# Altium PCB IRsensor_Relay_Controller.PcbDoc
Units mm, origin at the board's own origin, x right, y up, seen from the top; angles counter-clockwise.
Board outline 106.5 x 78.56 mm, 2 copper layers (Top Layer, Bottom Layer); 31 components, 26 nets, 92 pads, 0 vias.
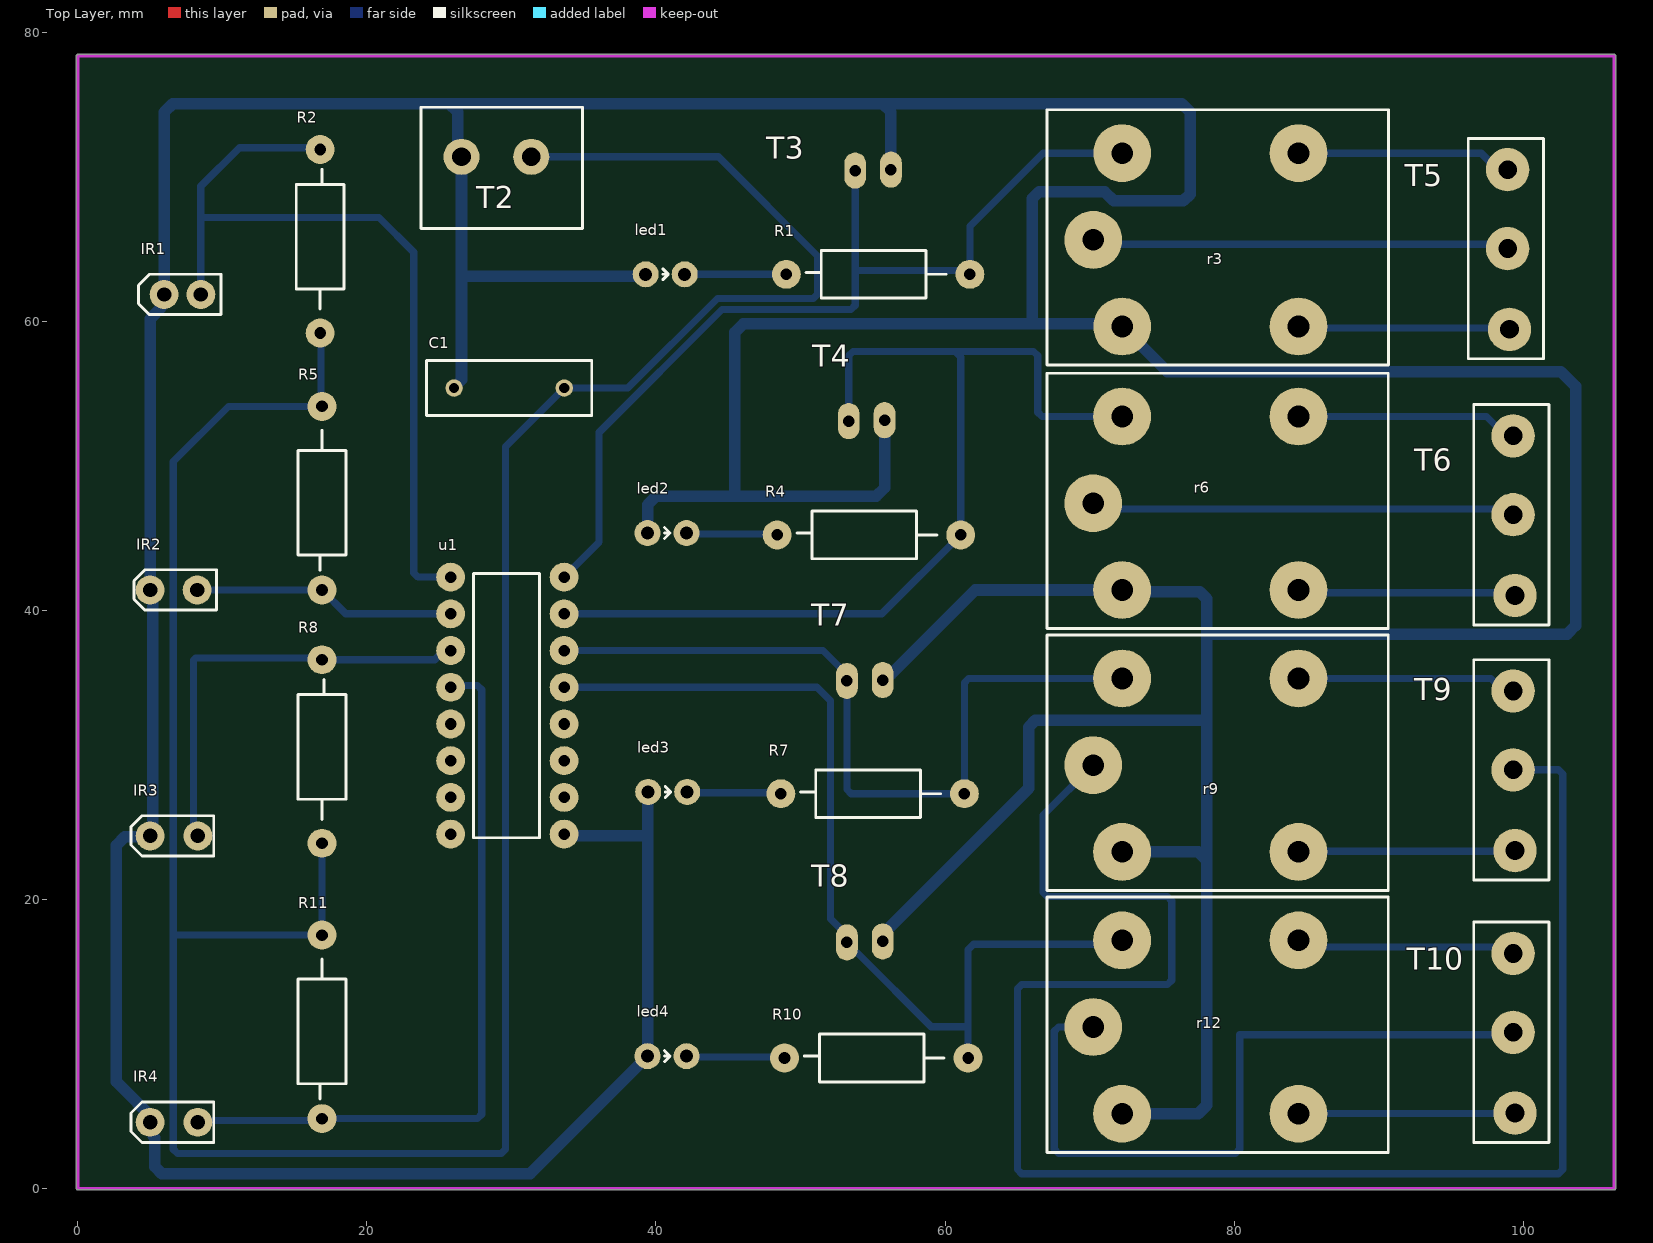
[diagram p0: Top Layer view]
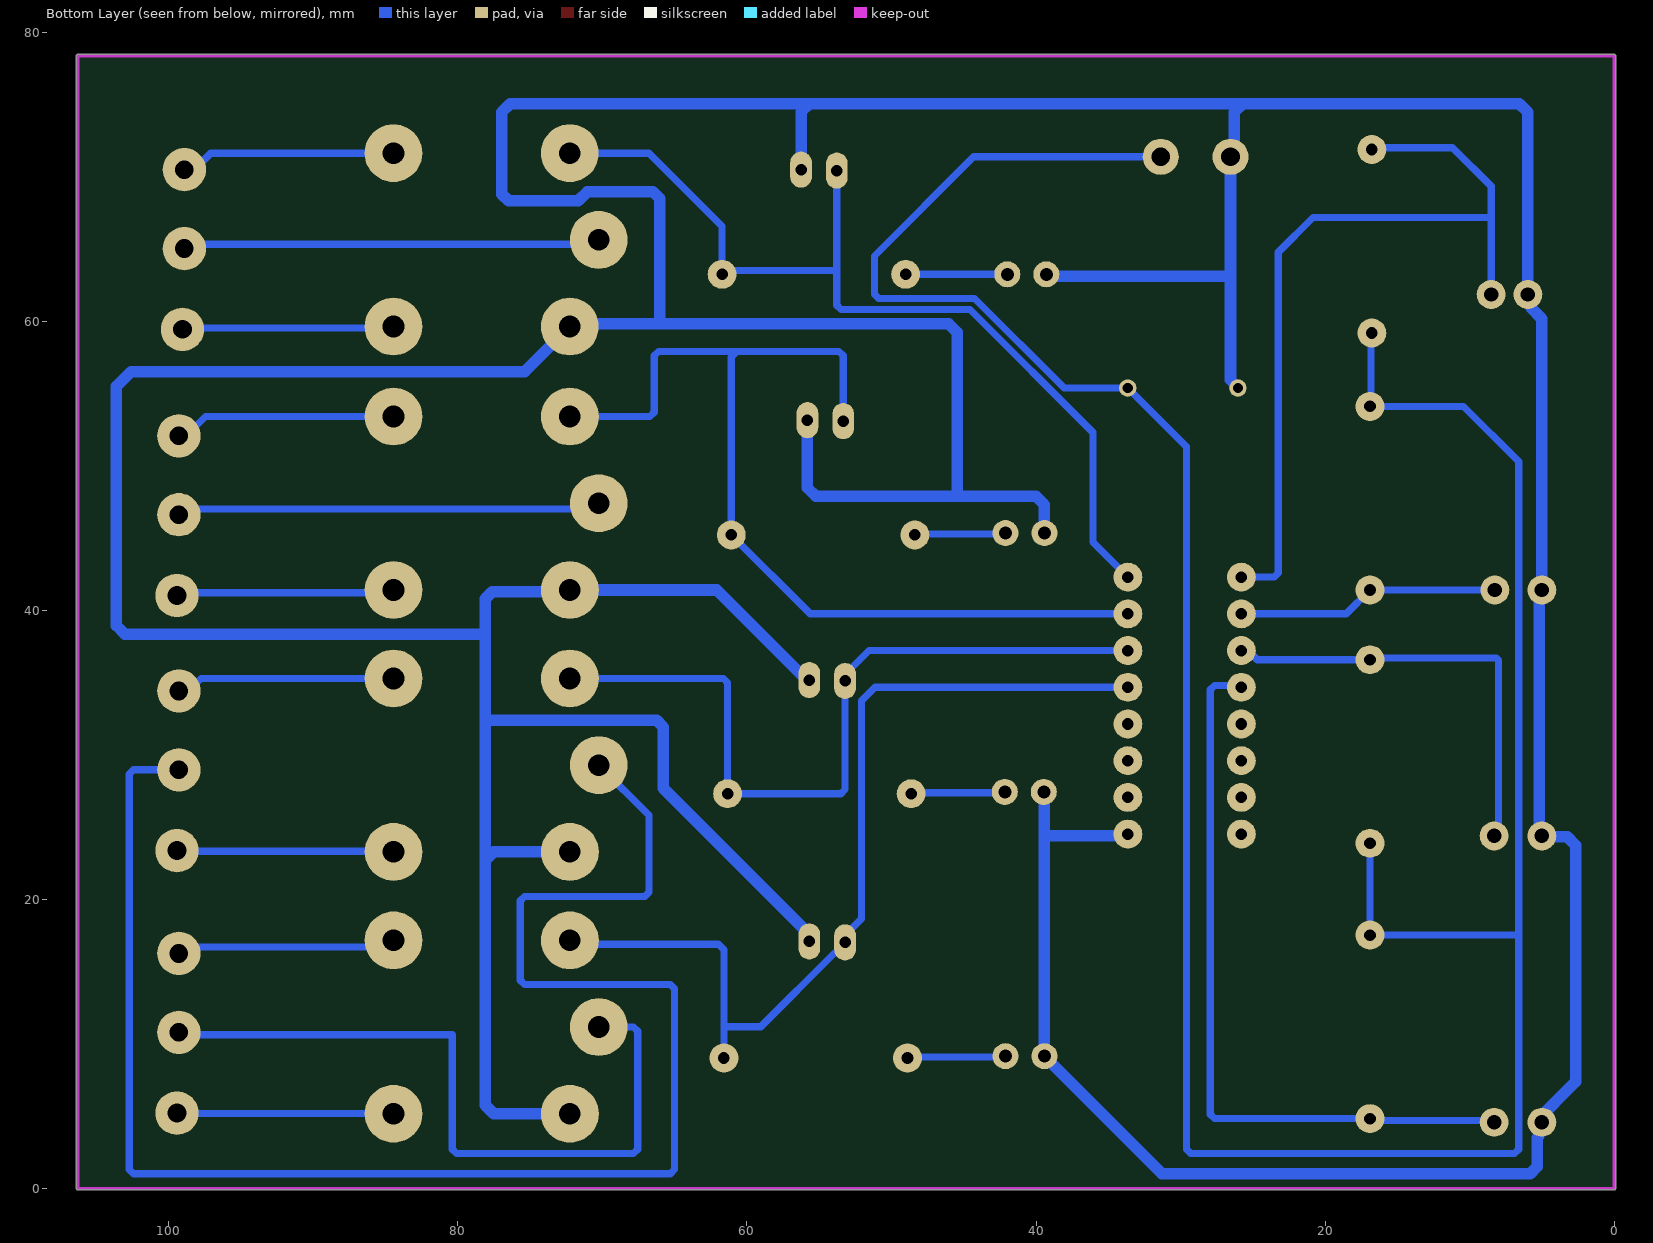
[diagram p1: Bottom Layer view, seen from below]
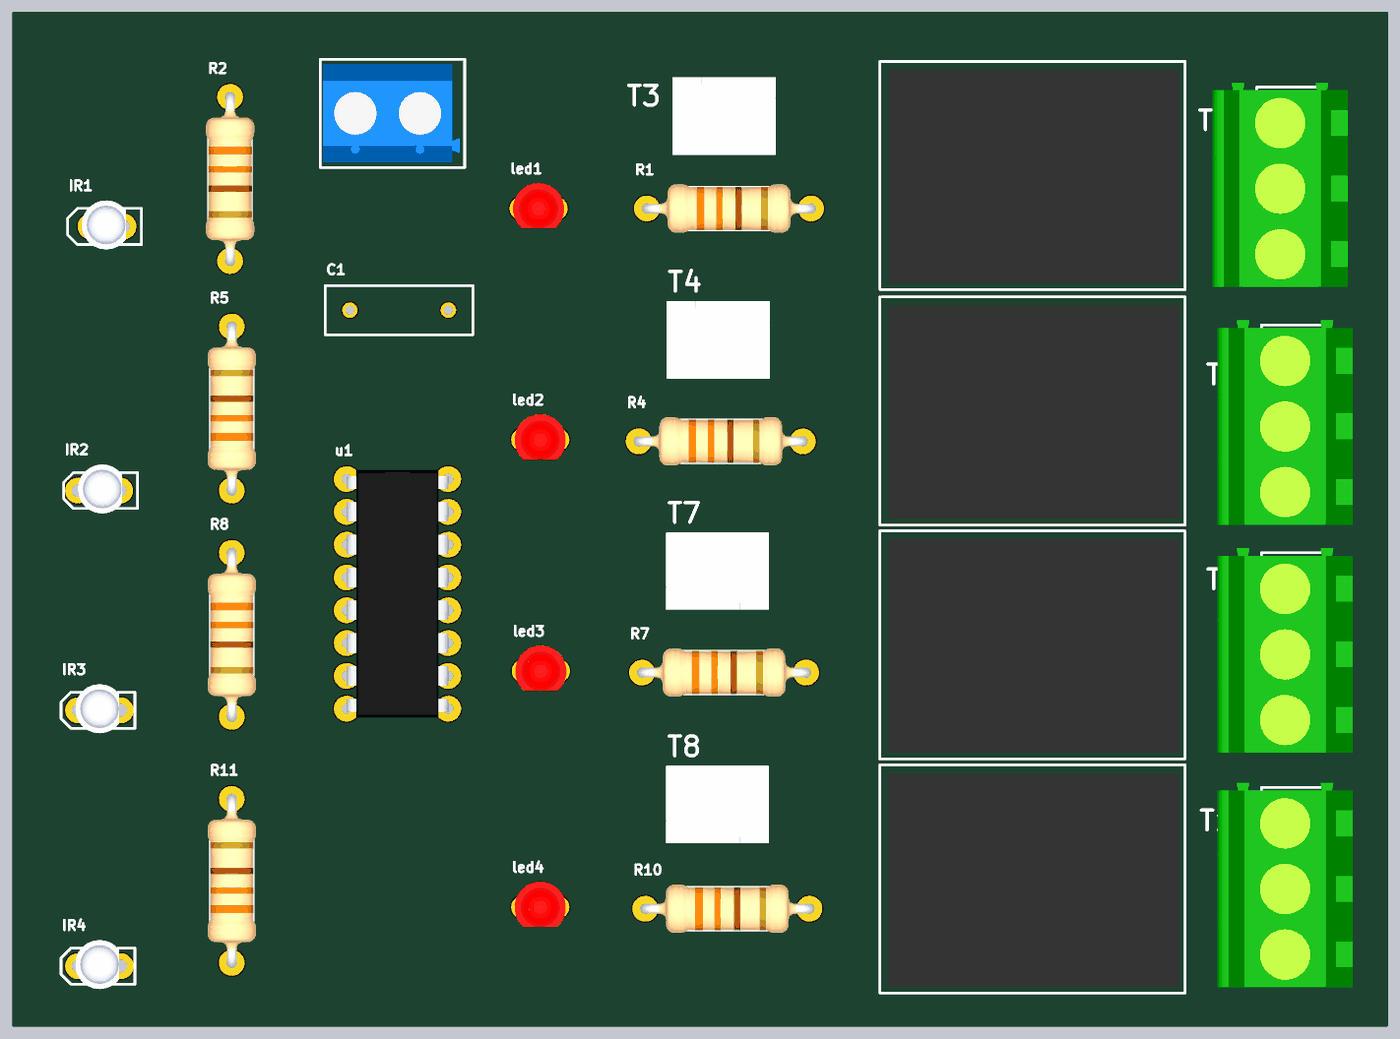
[diagram p2: 3D render of the assembled board from above, using the file's embedded part models]

## Layer stack, top to bottom
Top Solder: solder mask 0.0102, Solder Resist, Dk 3.5
Top Layer: signal copper 0.0356
Dielectric 1: dielectric 0.32, FR-4, Dk 4.8
Bottom Layer: signal copper 0.0356
Bottom Solder: solder mask 0.0102, Solder Resist, Dk 3.5

## Board outline
0,-0.1 cw(c0,0) -0.1,0 -0.1,78.359 cw(c0,78.359) 0,78.459 106.299,78.459 cw(c106.299,78.359) 106.399,78.359 106.399,0 cw(c106.299,0) 106.299,-0.1

## Design rules (kind name [scope] priority, off if disabled: settings)
Clearance Clearance_puli [InPolygon] p1: gap=1 ignorepadtopadclearanceinfootprint=FALSE
Clearance [All] p2: gap=0.25 ignorepadtopadclearanceinfootprint=FALSE
HoleSize [All] p1: absolutevalues=TRUE maxlimit=5 minlimit=0.1 maxpercent=80.000 minpercent=20.000
HoleToHoleClearance [All] p1: gap=0.2 allowstackedmicrovias=TRUE
MinimumSolderMaskSliver [All] p1: minsoldermaskwidth=0.1
PolygonConnect [All] p1: connectstyle=Relief reliefconductorwidth=0.254 reliefentries=4 polygonreliefangle="90 Angle" airgapwidth=0.254
RoutingVias [All] p1: holewidth=0.6 width=0.8 viastyle="Through Hole" minholewidth=0.5 minwidth=0.7 maxholewidth=1 maxwidth=2
SilkToSilkClearance [All] p1: silktosilkclearance=0.1
SilkToSolderMaskClearance [IsPad] p1: minsilkscreentomaskgap=0.1 clearancetoexposedcopper=TRUE
SolderMaskExpansion [All] p1: expansion=0.102 istentingtop=FALSE
Width [All] p1: maxlimit=1 minlimit=0.25 preferedwidth=0.3
25 further rules are at their usual default settings.

## Components (designator, comment, footprint, x,y, rotation, side; value= is the part's Value field where it differs from the comment)
C1 "Cap" RAD-0.3 29.845,55.372 r0 top value=100pF
IR1 "IR" "IR sensor"#1 8.509,61.849 r180 top
IR2 "IR" "IR sensor"#2 8.208,41.402 r180 top
IR3 "IR" "IR sensor"#3 8.001,24.384 r180 top
IR4 "IR" "IR sensor"#3 8.001,4.572 r180 top
led1 "led" led 40.64,63.246 r180 top
led2 "led" led 40.767,45.339 r180 top
led3 "led" led 40.814,27.432 r180 top
led4 "led" led 40.767,9.144 r180 top
R1 "R" "resistor 1/4 watt" 55.372,63.246 r0 top
R2 "R" "resistor 1/4 watt" 16.764,65.532 r270 top
r3 "relay" "relay 5vdc" 72.263,59.628 r0 top
R4 "R" "resistor 1/4 watt" 54.737,45.212 r0 top
R5 "R" "resistor 1/4 watt" 16.891,47.752 r90 top
r6 "relay" "relay 5vdc" 72.255,41.402 r0 top
R7 "R" "resistor 1/4 watt" 54.991,27.305 r0 top
R8 "R" "resistor 1/4 watt" 16.891,30.226 r270 top
r9 "relay" "relay 5vdc" 72.255,23.281 r0 top
R10 "R" "resistor 1/4 watt" 55.245,9.017 r0 top
R11 "R" "resistor 1/4 watt" 16.891,11.176 r90 top
r12 "relay" "relay 5vdc" 72.255,5.159 r0 top
T2 "terminal" "terminal 2pin" 28.956,71.374 r90 top
T3 "terminal C" "terminal C 2pin" 54.991,70.358 r0 top
T4 "terminal C" "terminal C 2pin" 54.546,53.023 r0 top
T5 "terminal" "terminal 3pin" 98.996,64.96 r180 top
T6 "terminal" "terminal 3pin" 99.377,46.545 r180 top
T7 "terminal C" "terminal C 2pin" 54.483,35.234 r180 top
T8 "terminal C" "terminal C 2pin" 54.483,17.145 r180 top
T9 "terminal" "terminal 3pin" 99.377,28.892 r180 top
T10 "terminal" "terminal 3pin" 99.377,10.731 r180 top
u1 "uln2003" uln2003 29.718,33.401 r0 top

## Footprints (in the part's own frame and the unit in brackets; to place one, negate y for a bottom-side part, rotate by r counter-clockwise, add the part's x,y. Pads: shape width x height; smd on the part's side, far side on the other; paste and mask are expansions set on the pad)
"IR sensor"#1 [mm]
  round 2 hole 1: +(0,0) -(2.54,0)
  silkscreen extent -1.4,-1.4 4.32,1.4, body extent -0.19,-2.02 3.24,1.78, height 12.58
"IR sensor"#2 [mm]
  round 2 hole 1: +(-0.045,0) -(3.208,0)
  silkscreen extent -1.4,-1.4 4.32,1.4, body extent -0.19,-2.02 3.24,1.78, height 12.58
"IR sensor"#3 [mm]
  round 2 hole 1: +(-0.299,0) -(3.001,0)
  silkscreen extent -1.4,-1.4 4.32,1.4, body extent -0.19,-2.02 3.24,1.78, height 12.58
led [mm]
  round 1.8 hole 0.9: +(1.35,0) -(-1.35,0)
  silkscreen extent -0.21,-0.38 0.17,0.38, body extent -1.99,-1.97 1.99,1.52, height 8.57
RAD-0.3 [mm] "Radial Cap, Thru-Hole; 2 Leads; 0.3 in Pin Spacing"
  round 1.2 hole 0.7: 1(-3.81,0) 2(3.81,0)
  silkscreen extent -5.71,-1.91 5.71,1.91
"relay 5vdc" [mm]
  round 4 hole 1.5: 1(0,0) 2(0,12) 3(-2.001,6) 4(12.2,0) 5(12.2,12)
  silkscreen extent -5.21,-2.67 18.41,15, body extent -4.52,-2.15 17.98,14.35, height 19.01
"resistor 1/4 watt" [mm]
  round 2 hole 0.8: 1(-6.35,0) 2(6.35,0)
  silkscreen extent -4.99,-1.65 4.7,1.65, body extent -6.73,-1.87 6.72,1.87, height 9.39
"terminal 2pin" [mm]
  round 2.5 hole 1.3: 1(0,2.413) 2(0,-2.413)
  silkscreen extent -4.95,-5.97 3.43,5.21, body extent -4.56,-5.6 3.04,5, height 13.01
"terminal 3pin" [mm]
  round 3 hole 1.3: 1(-0.064,5.524) 2(0.064,-0.063) 3(0.064,-5.524)
  silkscreen extent -2.41,-7.68 2.79,7.56, body extent -4.28,-8.05 6.22,7.79, height 11.99
"terminal C 2pin" [mm]
  oval 1.5x2.5 hole 0.8: 1(-1.206,0.064) 2(1.27,0.127)
  body extent -4,-2.95 4,3.05, height 11.01
uln2003 [mm]
  round 2 hole 0.8: Gnd(-3.925,-8.89) in1(-3.925,8.89) in2(-3.925,6.35) in3(-3.925,3.81) in4(-3.925,1.27) in5(-3.925,-1.27) in6(-3.925,-3.81) in7(-3.925,-6.35) out1(3.925,8.89) out2(3.925,6.35) out3(3.925,3.81) out4(3.925,1.27) out5(3.925,-1.27) out6(3.925,-3.81) out7(3.925,-6.35) Vcc(3.925,-8.89)
  silkscreen extent -2.35,-9.14 2.22,9.14, body extent -3.94,-9.59 3.93,9.59, height 3.31

## Part data
C1: "Capacitor", LatestRevisionDate=17-Jul-2002, LatestRevisionNote="Re-released for DXP Platform.", PackageDescription="Radial Cap, Thru-Hole; 2 Leads; 0.3 in Pin Spacing", PackageReference=RAD-0.3, Published=8-Jun-2000, Publisher="Altium Limited"
IR1 IR2 IR3 IR4: library part IR204-A, "EMITTER IR 940NM 100MA RADIAL", Case/Package=Radial, Forward Current=100mA, Forward Voltage=4V, Manufacturer=Everlight, Max Operating Temperature=85°C, Min Operating Temperature=-40°C, Package Quantity=1000, Power Dissipation=150mW, Reverse Voltage=5V, Supplier Part Number 1=7000312, Category=LEDs, ComponentLink1Description=https://datasheet.ciiva.com/4256/743ir204a-4256867.pdf?src-supplier=Arrow+Electronics, ComponentLink1URL=https://datasheet.ciiva.com/4256/743ir204a-4256867.pdf?src-supplier=Arrow+Electronics, ComponentLink2Description=https://datasheet.ciiva.com/26901/getdatasheetpartid-554119-26901401.pdf?src-supplier=Verical, ComponentLink2URL=https://datasheet.ciiva.com/26901/getdatasheetpartid-554119-26901401.pdf?src-supplier=Verical, ComponentLink3Description=https://datasheet.ciiva.com/2107/201407052050005040-2107715.pdf?src-supplier=Digi-Key, ComponentLink3URL=https://datasheet.ciiva.com/2107/201407052050005040-2107715.pdf?src-supplier=Digi-Key, Depth=4mm, Lead Free="Lead Free", Length=4mm, Lens Style=Circular, Manufacturer Part Number=IR204-A, Mount="Through Hole", Number of Elements=1, Number of LEDs=1, Number of Pins=2, Orientation="Top View", Packaging=Bulk, Pricing 1="1000=0.07200, 4000=0.04950, 10000=0.04750, 25000=0.04560, 40000=0.04460 (USD)", Radiation Hardening=No, RoHS=Yes, RoHS Compliant=Yes, Series=-, Stock 1=21000, Supplier 1="Future Electronics", Test Current=100mA, Viewing Angle=35°, Wavelength=940nm
led1 led2 led3 led4: "LED,  5MM,  HIGH EFFICIENCY,  DIFFUSED,  RED", Case/Package=Radial, Color=Red, Current Rating=25mA, Forward Current=10mA, Forward Voltage=2V, Manufacturer=Dialight, Manufacturer Part Number=521-9240F, Max Operating Temperature=100°C, Min Operating Temperature=-55°C, Power Dissipation=60mW, Supplier Part Number 1=350-2676-ND, Category=LEDs, ComponentLink1Description=https://datasheet.ciiva.com/15974/5219240f-15974474.pdf?src-supplier=Onlinecomponents.com, ComponentLink1URL=https://datasheet.ciiva.com/15974/5219240f-15974474.pdf?src-supplier=Onlinecomponents.com, ComponentLink2Description=https://datasheet.ciiva.com/6350/521-9240f-web-6350299.pdf?src-supplier=Digi-Key, ComponentLink2URL=https://datasheet.ciiva.com/6350/521-9240f-web-6350299.pdf?src-supplier=Digi-Key, ComponentLink3Description=https://datasheet.ciiva.com/15209/getdatasheetpartid-245795-15209671.pdf?src-supplier=Verical, ComponentLink3URL=https://datasheet.ciiva.com/15209/getdatasheetpartid-245795-15209671.pdf?src-supplier=Verical, Height=8.94mm, Illumination Color=Red, Lens Color=Red, Lens Size=5mm, Lens Style=Diffused,Tinted,Round,Domed,Dome,Colored, Lens Transparency=Diffused, Luminous Intensity=6.3mcd, Mount="Through Hole", Number of Elements=1, Number of LEDs=1, Number of Pins=2, Packaging=Bulk, Pricing 1="1=0.77000, 10=0.50600, 100=0.33500, 1000=0.25866, 2000=0.23373, 5000=0.22050 (USD)", Radiation Hardening=No, REACH SVHC="No SVHC", RoHS=Yes, RoHS Compliant=Yes, Series=521, Stock 1=2866, Supplier 1=Digi-Key, Test Current=10mA, Viewing Angle=50°
R1 R2 R4 R5 R7 R8 R10 R11: library part "resistor 1/4 watt", "RES 330 OHM 1/4W 5% AXIAL", Insulation Resistance=1GR, Manufacturer="TE Connectivity", Manufacturer Part Number=CBT25J330R, Max Operating Temperature=125°C, Max Power Dissipation=250mW, Min Operating Temperature=-55°C, Number of Resistors=1, Resistance=330R, Resistance Tolerance=5%, Resistor Type="Power resistor", Supplier Part Number 1=A105936CT-ND, Temperature Coefficient=400ppm/°C, Voltage Rating=250V, Category="Through-Hole Resistors", ComponentLink1Description=https://datasheet.ciiva.com/7657/39351-7657213.pdf?src-supplier=Element14, ComponentLink1URL=https://datasheet.ciiva.com/7657/39351-7657213.pdf?src-supplier=Element14, Diameter=2.4mm, ELV=Compliant, Lead Diameter=0.6mm, Lead Length=27mm, Length=6.3mm, Mount=Axial, Number of Terminations=2, Packaging="Tape and Reel", Power Rating=250mW, Pricing 1="1=0.65000, 10=0.46400, 25=0.36200, 50=0.30620, 100=0.24120, 250=0.20408, 500=0.16698, 1000=0.12988 (USD)", REACH SVHC=Unknown, RoHS=Yes, RoHS Compliant=Yes, Series="CBT, Neohm", Stock 1=3829, Supplier 1=Digi-Key, Technology="CARBON COMPOSITION", Termination=Axial, Tolerance=5%
r3 r6 r9 r12: library part "relay 5v", "TE CONNECTIVITY         V23101-D0007-A201             Signal Relay, W11/V23101 Series, SPDT, 24 VDC, 1.25 A, Through Hole, Non Latching", Coil Power=450mW, Coil Resistance=1.28kR, Coil Voltage (DC)=24V, Contact Current Rating=1.25A, Manufacturer="TE Connectivity", Manufacturer Part Number=V23101-D0007-A201, Supplier Part Number 1=24M9081, Category=Relays, Coil Type=Non-Latching, ComponentLink1Description=https://datasheet.ciiva.com/6764/13765-6764705.pdf?src-supplier=Newark, ComponentLink1URL=https://datasheet.ciiva.com/6764/13765-6764705.pdf?src-supplier=Newark, ComponentLink2Description=https://datasheet.ciiva.com/1525/1717880-1525156.pdf?src-supplier=Element14, ComponentLink2URL=https://datasheet.ciiva.com/1525/1717880-1525156.pdf?src-supplier=Element14, Contact Material=Silver, Height=15.6mm, Pricing 1="1=3.98000, 10=3.75000, 25=3.54000, 50=3.33000, 100=3.13000, 500=2.54000 (USD)", REACH SVHC=Unknown, RoHS=No, RoHS Compliant=No, Stock 1=78, Supplier 1=Newark, Throw Configuration=SPDT, Width=10.6mm
T2: library part "terminal 2pin", "PCB Terminal Block 3 Poles, 5 mm Pitch, 691101710003, Würth Elektronik", Color=Blue, Current=16A, Manufacturer="Wurth Electronics", Manufacturer Part Number=691101710003, Max Operating Temperature=105°C, Min Operating Temperature=-40°C, Package Quantity=400, Supplier Part Number 1=732-2027-ND, Voltage=250V, Category="Terminal Blocks", ComponentLink1Description=https://datasheet.ciiva.com/824/6911017100xx-824072.pdf?src-supplier=Digi-Key, ComponentLink1URL=https://datasheet.ciiva.com/824/6911017100xx-824072.pdf?src-supplier=Digi-Key, Contact Material=Brass, Contact Plating=Tin, Current Rating=16A, Height=16.4mm, Housing Material=PA66, Length=9mm, Mount="Through Hole", Number of Contacts=3, Number of Levels=1, Number of Positions Per Level=3, Packaging=Bulk, Pitch=0.197inch, Plating=Steel, Pricing 1="1=0.96000, 10=0.86200, 50=0.74500, 100=0.69120 (USD)", REACH SVHC=Unknown, RoHS=Yes, RoHS Compliant=Yes, Series="WR-TBL Series 101", Stock 1=1007, Stripping Length=-7mm, Supplier 1=Digi-Key, Termination=Screw, Voltage Rating=250V, Width=16.2mm, Wire Gauge (Max)=26AWG, Wire Gauge (Min)=14AWG, Wire/Cable Gauge=26AWG
T3 T4 T7 T8: library part "terminal Cu", ".100 TERMINAL ASSEMBLY", Manufacturer=Samtec, Manufacturer Part Number=IPL1-102-01-S-S-RA-K, Max Current Rating=7.4A, Max Operating Temperature=125°C, Max Voltage Rating (AC)=675V, Min Operating Temperature=-55°C, Supplier Part Number 1=SAM12667-ND, Category="Headers and Wire Housings", ComponentLink1Description=https://datasheet.ciiva.com/9446/ipl1-9446232.pdf?src-supplier=Avnet, ComponentLink1URL=https://datasheet.ciiva.com/9446/ipl1-9446232.pdf?src-supplier=Avnet, ComponentLink2Description=https://datasheet.ciiva.com/16677/ipl1-16677866.pdf?src-supplier=Avnet+Europe, ComponentLink2URL=https://datasheet.ciiva.com/16677/ipl1-16677866.pdf?src-supplier=Avnet+Europe, Contact Material=Bronze, Contact Plating=Gold, Depth=9.65mm, Gender=Male, Housing Material=Polymer, Length=6.6mm, Mount="Through Hole", Number of Contacts=2, Number of Ports=1, Number of Terminals/Pins=2, Orientation="Right Angle", Packaging=Bulk, Pitch=2.54mm, Pricing 1="1=5.56000, 10=5.05300, 80=4.45200, 440=3.78420, 945=3.22770 (USD)", Radiation Hardening=No, RoHS=Yes, RoHS Compliant=Yes, Stock 1=73, Supplier 1=Digi-Key, Termination=Solder
T5 T6 T9 T10: library part "terminal 3pin", "Conn Mini-Power Terminal Strip HDR 12 POS 2.54mm Solder ST SMD 12 Terminal 1 Port", Color=Natural, Manufacturer=Samtec, Manufacturer Part Number=IPL1-106-02-L-D-K, Max Current Rating=7.4A, Max Operating Temperature=125°C, Max Voltage Rating (AC)=675V, Min Operating Temperature=-55°C, Package Quantity=1, Supplier Part Number 1=SAM10584-ND, Category="Headers and Wire Housings", ComponentLink1Description=https://datasheet.ciiva.com/9444/ipl1-9444382.pdf?src-supplier=Avnet, ComponentLink1URL=https://datasheet.ciiva.com/9444/ipl1-9444382.pdf?src-supplier=Avnet, ComponentLink2Description=https://datasheet.ciiva.com/16677/ipl1-16677742.pdf?src-supplier=Avnet+Europe, ComponentLink2URL=https://datasheet.ciiva.com/16677/ipl1-16677742.pdf?src-supplier=Avnet+Europe, ComponentLink3Description=https://datasheet.ciiva.com/739/ipl1-1xx-xx-xxx-d-xx-x-mkt-739359.pdf?src-supplier=Digi-Key, ComponentLink3URL=https://datasheet.ciiva.com/739/ipl1-1xx-xx-xxx-d-xx-x-mkt-739359.pdf?src-supplier=Digi-Key, Connector Type="Male Pin", Contact Material=Bronze, Contact Mating Length=0.215inch, Contact Plating=Gold, Contact Type="Male Pin", Depth=9.58mm, Fastening Type=Ramp, Gender=Male, Housing Material=Polymer, Length=16.76mm, Mount="Surface Mount", Number of Contacts=12, Number of Ports=1, Number of Positions=12, Number of Rows=2, Number of Terminals/Pins=12, Orientation=Straight, Packaging=Rail/Tube, Pitch=2.54mm, Pricing 1="1=5.43000, 34=4.67294, 102=4.34696, 442=3.69495, 952=3.15158 (USD)", Radiation Hardening=No, RoHS=Yes, RoHS Compliant=Yes, Row Spacing=0.1inch, Series="Mini Mate® IPL1", Stock 1=86, Supplier 1=Digi-Key, Termination=Solder
u1: library part ULN2003ADR, "TEXAS INSTRUMENTS - ULN2003ADR - Bipolar Transistor Array, Darlington, NPN, 50 V, 350 mA, SOIC", Case/Package=SOIC, Collector Emitter Breakdown Voltage=50V, Collector Emitter Saturation Voltage=1.1V, Current Rating=500mA, Manufacturer="Texas Instruments", Max Operating Temperature=70°C, Min Operating Temperature=-20°C, Package Quantity=1, Supplier Part Number 1=296-1368-1-ND, Category="Interface ICs", Collector Emitter Voltage (VCEO)=50V, ComponentLink1Description=https://datasheet.ciiva.com/27049/700605-27049624.pdf?src-supplier=Jameco, ComponentLink1URL=https://datasheet.ciiva.com/27049/700605-27049624.pdf?src-supplier=Jameco, ComponentLink2Description=https://datasheet.ciiva.com/15139/getdatasheetpartid-40508-15139849.pdf?src-supplier=Verical, ComponentLink2URL=https://datasheet.ciiva.com/15139/getdatasheetpartid-40508-15139849.pdf?src-supplier=Verical, ComponentLink3Description=https://datasheet.ciiva.com/1700/uln2003a-1700766.pdf?src-supplier=Digi-Key, ComponentLink3URL=https://datasheet.ciiva.com/1700/uln2003a-1700766.pdf?src-supplier=Digi-Key, ComponentLink4Description=https://datasheet.ciiva.com/1700/uln2003a-1700767.pdf?src-supplier=Digi-Key, ComponentLink4URL=https://datasheet.ciiva.com/1700/uln2003a-1700767.pdf?src-supplier=Digi-Key, ComponentLink5Description=https://datasheet.ciiva.com/1700/uln2003a-1700768.pdf?src-supplier=Digi-Key, ComponentLink5URL=https://datasheet.ciiva.com/1700/uln2003a-1700768.pdf?src-supplier=Digi-Key, ComponentLink6Description=https://datasheet.ciiva.com/14424/ulq2003a-14424060.pdf?src-supplier=Avnet, ComponentLink6URL=https://datasheet.ciiva.com/14424/ulq2003a-14424060.pdf?src-supplier=Avnet, ComponentLink7Description=https://datasheet.ciiva.com/14424/ulq2003a-14424061.pdf?src-supplier=Avnet, ComponentLink7URL=https://datasheet.ciiva.com/14424/ulq2003a-14424061.pdf?src-supplier=Avnet, ComponentLink8Description=https://datasheet.ciiva.com/46423/1831474-46423371.pdf?src-supplier=Element14, ComponentLink8URL=https://datasheet.ciiva.com/46423/1831474-46423371.pdf?src-supplier=Element14, ComponentLink9Description=https://datasheet.ciiva.com/26229/ulq2003a-26229797.pdf?src-supplier=Avnet+Europe, ComponentLink9URL=https://datasheet.ciiva.com/26229/ulq2003a-26229797.pdf?src-supplier=Avnet+Europe, ComponentLink10Description=https://datasheet.ciiva.com/1193/1851982-1193407.pdf?src-supplier=Element14, ComponentLink10URL=https://datasheet.ciiva.com/1193/1851982-1193407.pdf?src-supplier=Element14, Contact Plating=Gold, Height=1.58mm, Lead Free="Lead Free", Length=9.9mm, Manufacturer Part Number=ULN2003ADR, Max Collector Current=500mA, Mount="Surface Mount", Number of Drivers=7, Number of Elements=7, Number of Pins=16, Packaging="Tape and Reel", Polarity=NPN, Pricing 1="1=0.56000, 10=0.47700, 25=0.44520, 100=0.35620, 500=0.27984, 1000=0.21624 (USD)", Radiation Hardening=No, REACH SVHC="No SVHC", RoHS=Yes, RoHS Compliant=Yes, Supplier 1=Digi-Key, Voltage Rating (DC)=50V, Weight=0.004998oz, Width=3.91mm

## Nets (pads, with @x,y where several pads share a name; then routed paths per layer and width w, separated by ;. In a path a pad name is that pad's centre, name@x,y a point inside that pad or via, vN(x,y) a via of type N, cw(c..) or ccw(c..) an arc to the next point about the centre after c; other vN are vias at no path point)
GND: C1.2 R2.2 R5.2 R8.2 R11.2 T2.2 | length 204.3
  Bottom Layer w0.5: 6.668,17.526 R11.2 R8.2 ; R2.2 16.828,59.118 16.828,54.165 R5.2 10.414,54.102 6.604,50.292 6.604,17.526 6.604,2.706 6.897,2.413 29.298,2.413 29.591,2.706 29.591,51.308 C1.2 38.055,55.372 44.25,61.567 50.888,61.567 51.181,61.86 51.181,64.516 44.323,71.374 T2.2
NetIR1_+: IR1.+ R2.1 u1.in1 | length 57.5
  Bottom Layer w0.5: IR1.+ 8.509,67.183 ; R2.1 16.637,72.009 11.176,72.009 8.509,69.342 8.509,67.183 ; u1.in1 23.534,42.291 23.241,42.584 23.241,64.77 20.828,67.183 8.509,67.183
NetIR2_+: IR2.+ R5.1 u1.in2 | length 18.2
  Bottom Layer w0.5: IR2.+@8.255,41.402 R5.1 18.542,39.751 u1.in2
NetIR3_+: IR3.+ R8.1 u1.in3 | length 30.3
  Bottom Layer w0.5: IR3.+@8.001,24.384 8.001,36.554 8.15,36.703 16.764,36.703 R8.1 24.686,36.576 25.321,37.211 u1.in3
NetIR4_+: IR4.+ R11.1 u1.in4 | length 51.7
  Bottom Layer w0.5: IR4.+@8.128,4.699 16.764,4.699 R11.1 27.647,4.826 27.94,5.119 27.94,34.505 27.647,34.798 25.92,34.798 u1.in4
Netled1_-: led1.- R1.1 | length 7
  Bottom Layer w0.5: led1.- R1.1
Netled2_-: led2.- R4.1 | length 6.3
  Bottom Layer w0.5: led2.- 42.181,45.276 48.323,45.276 R4.1
Netled3_-: led3.- R7.1 | length 6.5
  Bottom Layer w0.5: led3.- 42.227,27.368 48.578,27.368 R7.1
Netled4_-: led4.- R10.1 | length 6.8
  Bottom Layer w0.5: led4.- 42.181,9.08 48.831,9.08 R10.1
NetR1_2: R1.2 r3.2 T3.1 u1.out1 | length 65.5
  Bottom Layer w0.5: u1.out1 36.068,44.716 36.068,52.324 44.561,60.817 53.492,60.817 53.785,61.11 53.785,63.5 ; T3.1 53.785,63.5 ; R1.2@61.595,63.373 61.468,63.5 53.785,63.5 ; R1.2 61.722,66.565 66.785,71.628 r3.2
Netr3_3: r3.3 T5.2 | length 28.9
  Bottom Layer w0.5: r3.3 70.564,65.326 98.631,65.326 T5.2
Netr3_4: r3.4 T5.1 | length 14.7
  Bottom Layer w0.5: r3.4 84.559,59.532 98.964,59.532 T5.1
Netr3_5: r3.5 T5.3 | length 14.9
  Bottom Layer w0.5: r3.5 97.114,71.628 98.257,70.485 T5.3
NetR4_2: R4.2 r6.2 T4.1 u1.out2 | length 70.3
  Bottom Layer w0.5: u1.out2 55.626,39.751 R4.2 61.087,57.531 60.706,57.912 ; T4.1 53.34,57.619 53.633,57.912 60.706,57.912 ; r6.2 66.714,53.402 66.421,53.695 66.421,57.619 66.128,57.912 60.706,57.912
Netr6_3: r6.3 T6.2 | length 29.4
  Bottom Layer w0.5: r6.3 70.651,47.005 98.918,47.005 T6.2
Netr6_4: r6.4 T6.1 | length 15.1
  Bottom Layer w0.5: r6.4 84.645,41.212 99.251,41.212 T6.1
Netr6_5: r6.5 T6.3 | length 15.4
  Bottom Layer w0.5: r6.5 97.464,53.402 98.796,52.07 T6.3
NetR7_2: R7.2 r9.2 T7.2 u1.out3 | length 55.2
  Bottom Layer w0.5: u1.out3 51.554,37.211 53.213,35.552 53.213,35.052 53.213,27.598 53.506,27.305 R7.2 61.341,34.988 61.634,35.281 r9.2
Netr9_3: r9.3 T9.2 | length 117.2
  Bottom Layer w0.5: r9.3 66.786,25.813 66.786,20.486 67.079,20.193 75.399,20.193 75.692,19.9 75.692,14.39 75.399,14.097 65.317,14.097 65.024,13.804 65.024,1.309 65.317,1.016 102.45,1.016 102.743,1.309 102.743,28.663 102.45,28.956 T9.2
Netr9_4: r9.4 T9.1 | length 15
  Bottom Layer w0.5: r9.4 84.499,23.324 99.397,23.324 T9.1
Netr9_5: r9.5 T9.3 | length 15.2
  Bottom Layer w0.5: r9.5 97.774,35.281 98.638,34.417 T9.3
NetR10_2: R10.2 r12.2 T8.2 u1.out4 | length 65.3
  Bottom Layer w0.5: u1.out4 51.142,34.671 52.082,33.731 52.082,18.649 53.213,17.518 T8.2 53.213,16.855 53.789,16.28 53.951,16.28 59.055,11.176 61.595,11.176 ; R10.2 61.595,11.176 ; r12.2 71.987,16.891 61.976,16.891 61.595,16.51 61.595,11.176
Netr12_3: r12.3 T10.2 | length 51
  Bottom Layer w0.5: r12.3 67.857,11.159 67.564,10.867 67.564,2.706 67.857,2.413 80.098,2.413 80.391,2.706 80.391,10.629 99.148,10.629 T10.2
Netr12_4: r12.4 T10.1 | length 15
  Bottom Layer w0.5: r12.4 84.479,5.183 99.417,5.183 T10.1
Netr12_5: r12.5 T10.3 | length 15.4
  Bottom Layer w0.5: r12.5 84.469,17.159 84.709,17.399 85.4,16.708 98.862,16.708 T10.3
VCC: C1.1 IR1.- IR2.- IR3.- IR4.- led1.+ led2.+ led3.+ led4.+ r3.1 r6.1 r9.1 r12.1 T2.1 T3.2 T4.2 T7.1 T8.1 u1.Vcc | length 516.1
  Bottom Layer w0.8: C1.1 26.035,55.426 26.543,55.934 26.543,63.119 ; u1.Vcc 33.77,24.384 39.44,24.384 ; led1.+@39.353,63.182 led1.+ 39.163,63.119 26.543,63.119 ; led2.+ 39.417,47.293 40.003,47.879 45.466,47.879 ; led3.+ 39.44,27.409 39.44,24.384 ; T8.1 55.689,17.581 65.786,27.678 65.786,31.916 66.255,32.385 78.105,32.385 ; T7.1@55.689,34.988 55.689,35.353 55.92,35.584 56.285,35.584 62.103,41.402 r6.1 72.382,41.275 77.636,41.275 78.105,40.806 78.105,38.354 ; T4.2 55.816,48.465 55.231,47.879 45.466,47.879 ; T3.2 56.261,74.471 55.675,75.057 ; r12.1 77.519,5.16 78.105,5.745 78.105,22.695 ; r9.1 77.519,23.281 78.105,22.695 ; 25.703,75.057 26.289,74.471 26.289,71.628 T2.1 26.543,63.119 ; 25.703,75.057 55.675,75.057 ; 25.703,75.057 6.555,75.057 5.969,74.471 IR1.- 5.778,61.658 5.778,60.953 5,60.175 IR2.- 5,41.131 5.191,40.94 5.191,40.504 5.191,24.846 5.191,24.555 5.412,24.335 3.253,24.335 2.667,23.749 2.667,7.366 5.461,4.572 5.23,4.341 5.23,3.608 5.334,3.503 5.334,1.485 5.803,1.016 31.289,1.016 led4.+ 39.44,9.167 39.44,24.384 ; 45.466,47.879 45.466,59.231 46.052,59.817 66.04,59.817 ; 55.675,75.057 76.376,75.057 76.962,74.471 76.962,68.795 76.493,68.326 71.676,68.326 71.041,68.961 66.509,68.961 66.04,68.492 66.04,59.817 ; 66.04,59.817 72.074,59.817 r3.1 75.376,56.515 102.616,56.515 103.632,55.499 103.632,38.94 103.046,38.354 78.105,38.354 ; 78.105,22.695 78.105,32.385 ; 78.105,32.385 78.105,38.354
pads on no net: u1.Gnd u1.in5 u1.in6 u1.in7 u1.out5 u1.out6 u1.out7

## Keep-outs
Keep-Out Layer:
  lines w0.2: 0,0 106.299,0 106.299,78.359 103.632,78.359 0,78.359 0,0